# Altium PCB Curtain_robot.PcbDoc
Units mil, origin at the board's own origin, x right, y up, seen from the top; angles counter-clockwise.
Board outline 1771.65 x 787.4 mil, 2 copper layers (Top Layer, Bottom Layer); 38 components, 28 nets, 148 pads, 36 vias.
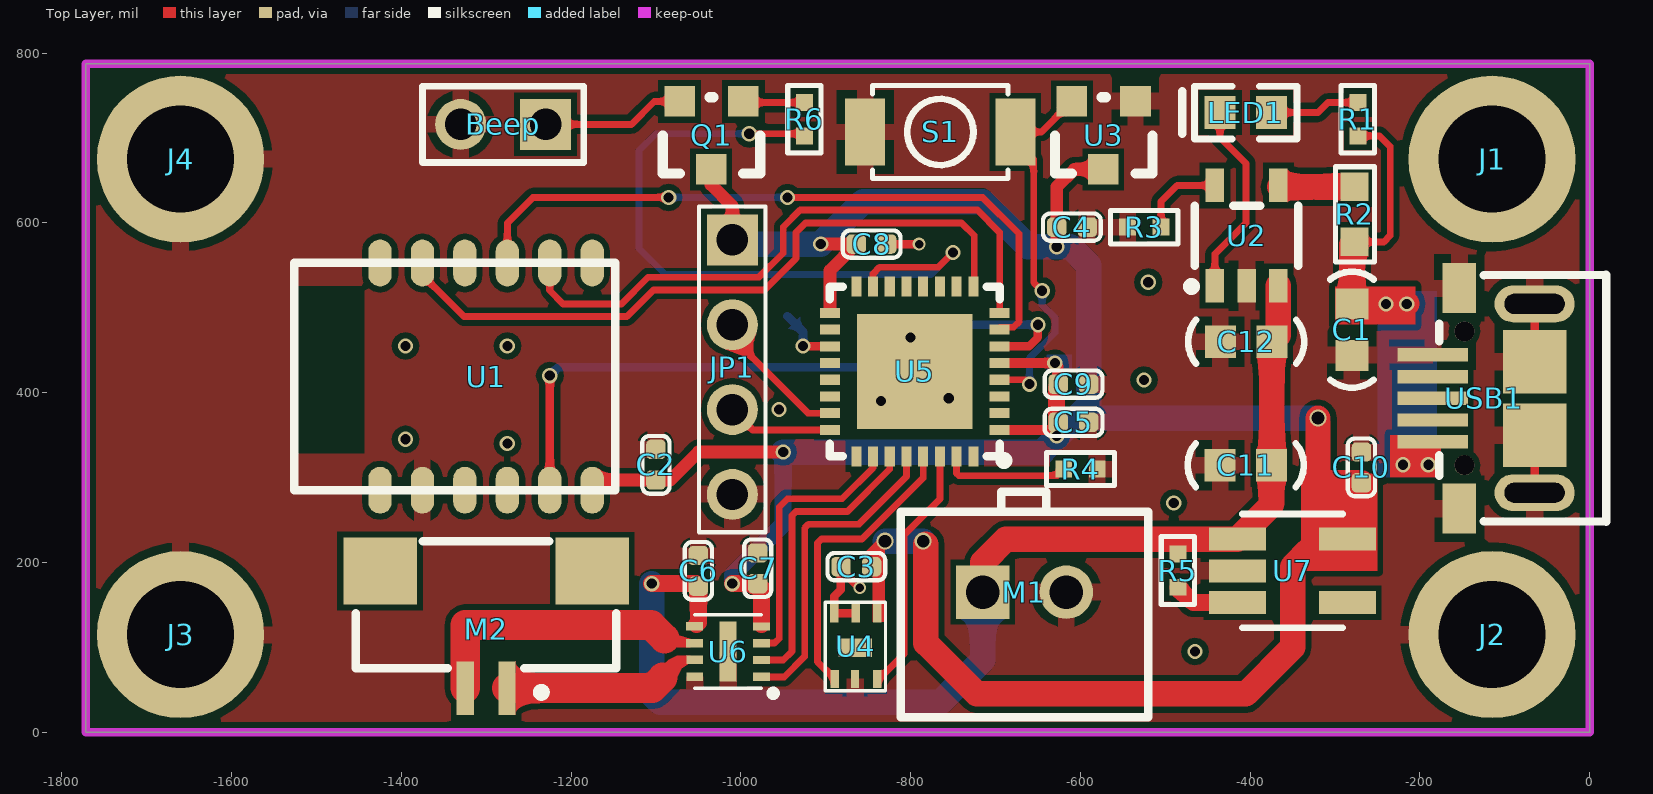
[diagram p0: Top Layer view]
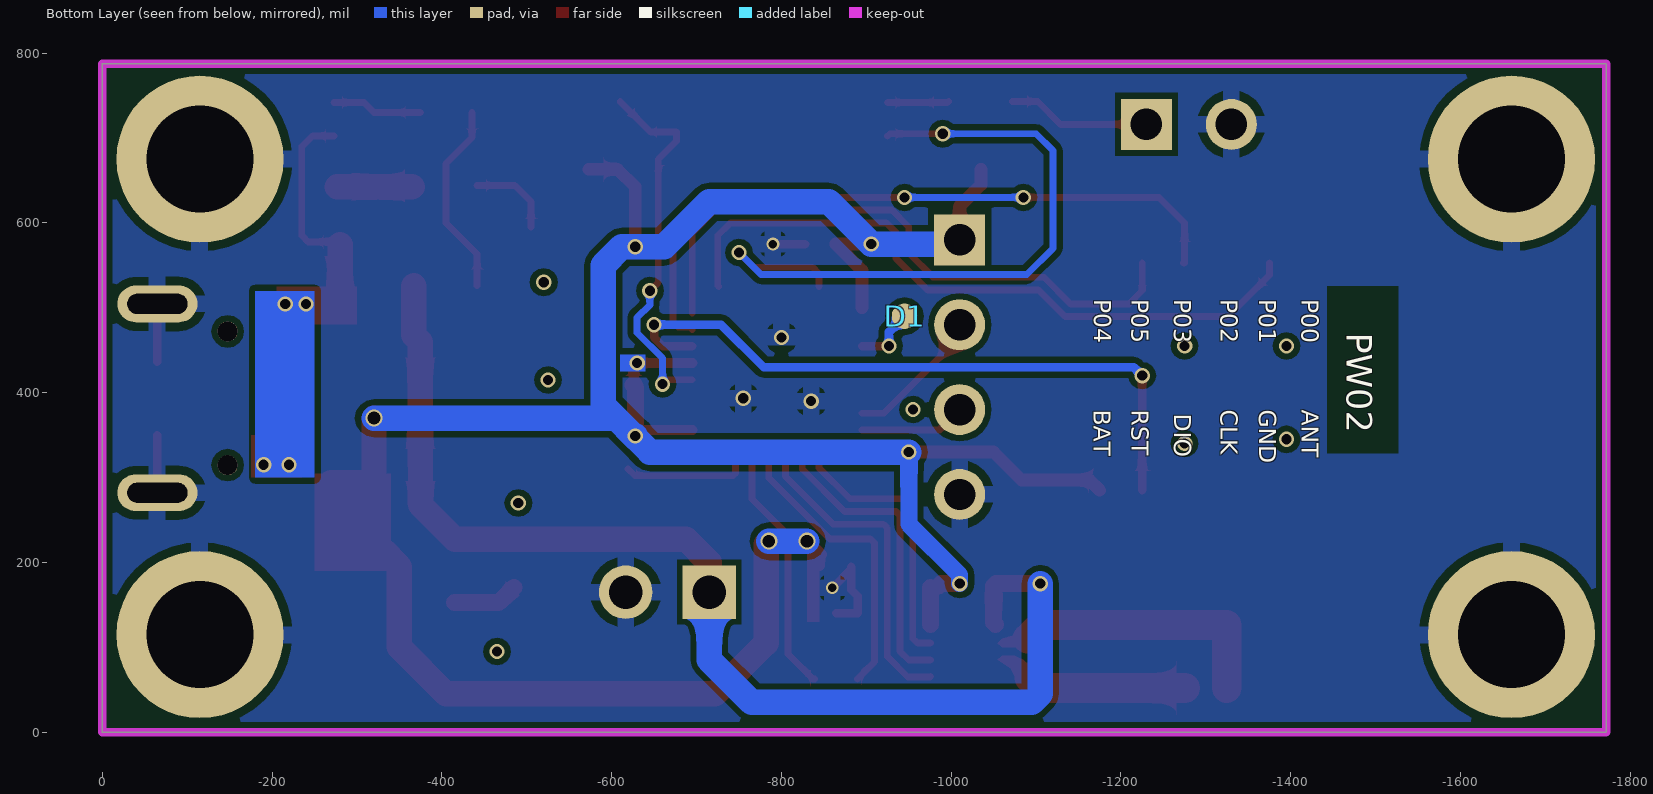
[diagram p1: Bottom Layer view, seen from below]
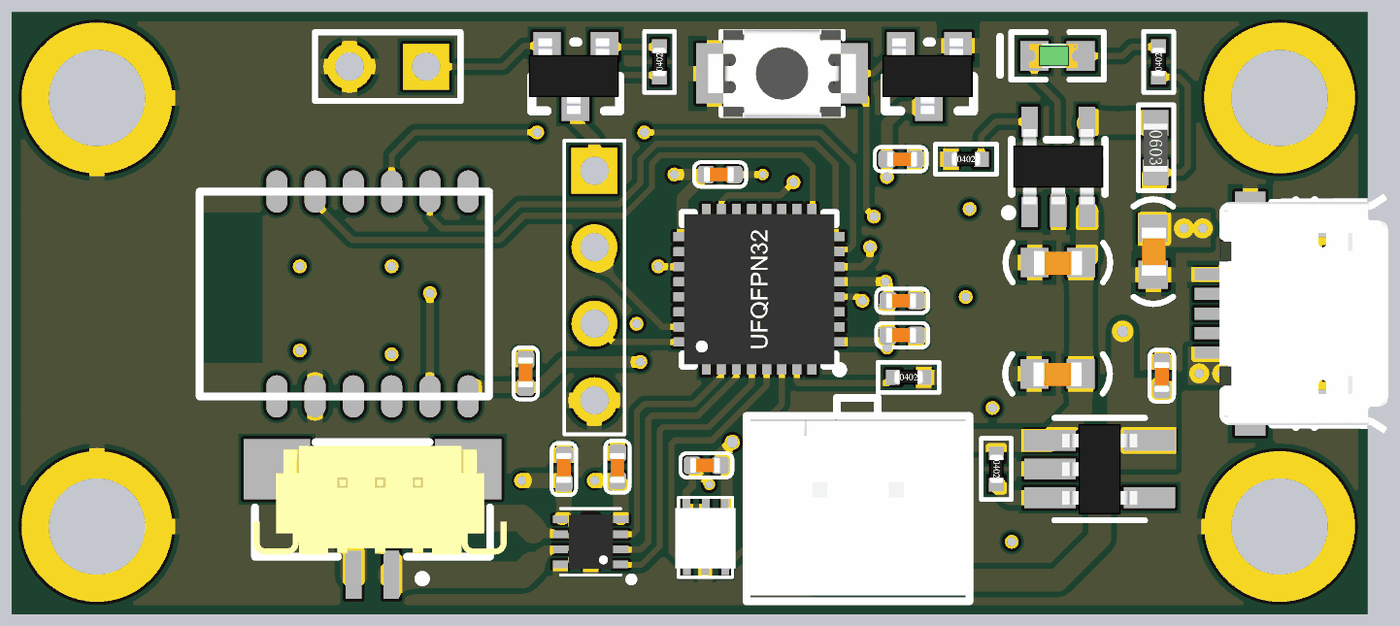
[diagram p2: 3D render of the assembled board from above, using the file's embedded part models]

## Layer stack, top to bottom
Top Solder: solder mask 0.4, Solder Resist, Dk 3.5
Top Layer: signal copper 1.4
Dielectric 1: dielectric 12.6, FR-4, Dk 4.8
Bottom Layer: signal copper 1.4
Bottom Solder: solder mask 0.4, Solder Resist, Dk 3.5

## Board outline
-1771.65,0 -1771.65,787.4 0,787.4 0,0

## Design rules (kind name [scope] priority, off if disabled: settings)
Clearance [All] p1: gap=7
ComponentClearance [All] p1: gap=0 collisioncheckmode=3 verticalgap=0 showdistances=FALSE
HoleSize [All] p1: absolutevalues=TRUE maxlimit=500 minlimit=1 maxpercent=80.000 minpercent=20.000
MinimumSolderMaskSliver [All] p1: minsoldermaskwidth=0
PlaneConnect [All] p1: planeconnectstyle=Relief reliefexpansion=20 reliefentries=4 reliefconductorwidth=20 reliefairgap=10
PolygonConnect [All] p1: connectstyle=Relief reliefconductorwidth=20 reliefentries=4 polygonreliefangle="90 Angle" airgapwidth=10
RoutingVias [All] p1: holewidth=12 width=18 viastyle="Through Hole" minholewidth=1 minwidth=1 maxholewidth=100 maxwidth=100
SilkToSilkClearance [All] p1: silktosilkclearance=0
SilkToSolderMaskClearance [IsPad] p1: minsilkscreentomaskgap=0 clearancetoexposedcopper=TRUE
SolderMaskExpansion [All] p1: expansion=4
Width [All] p1: maxlimit=100 minlimit=1 preferedwidth=10
24 further rules are at their usual default settings.

## Classes and differential pairs
component class Curtain_robot: Beep C1 C2 C3 C4 C5 C6 C8 C9 C10 C11 C12 D1 J1 J2 J3 J4 JP1 LED1 M1 M2 Q1 R1 R2 R3 R4 R5 R6 S1 U1 U2 U3 U4 U5 U6 U7

## Components (designator, comment, footprint, x,y, rotation, side; value= is the part's Value field where it differs from the comment)
Beep "Beep" HEADER_2X1_2.54MM -1230,716.04 r180 top
C1 "10uF" C-0603 -280,474.21 r90 top
C2 "100nF" C0402 -1100,315 r90 top
C3 "100nF" C0402 -863.9,195 r180 top
C4 "100nF" C0402 -609.89,595 r0 top
C5 "100nF" C0402 -608,365 r180 top
C6 "100nF" C0402 -1050,190 r90 top
C7 "100nF" C0402 -980,193.11 r270 top
C8 "100nF" C0402 -845.9,575 r180 top
C9 "100nF" C0402 -608,410 r180 top
C10 "100nF" C0402 -268.87,312 r270 top
C11 "1uF" C-0603 -405.12,314.57 r0 top
C12 "10uF" C-0603 -404.69,460 r0 top
D1 "Debug_test" DEBUG_TEST -945,490 r0 top
J1 "VIA" VIA -115,675 r0 top
J2 "VIA" VIA -115,115 r0 top
J3 "VIA" VIA -1660,115 r0 top
J4 "VIA" VIA -1660,675 r0 top
JP1 "Header_4x1_2.54mm" HEADER_4X1_2.54MM -1010,580 r270 top
LED1 "LED" LED0603 -405.12,730 r180 top
M1 "Battery" CONN-TH_P2.50_HX25035-2A -665.79,165 r0 top
M2 "Motor_N20" CONN-SMD_1.25-2P -1300,110 r180 top
Q1 "BC850CW-115" SOT-23(SOT-23-3) -996.87,743.53 r180 top
R1 "4.7K" R0402 -272.99,722.08 r90 top
R2 "0.6R" R0603 -276.97,610 r270 top
R3 "3.6K" R0402 -524.68,595 r0 top
R4 "1M" R0402 -599.68,310 r0 top
R5 "0R" R0402 -485,190.31 r270 top
R6 "1K" R0402 -925,722.08 r90 top
S1 "SPST" KEY -765,707.04 r180 top
U1 "PW02" "PW02 - DUPLICATE" -1147.83,285 r90 top
U2 "TP4065" SOT-23-5_L3.0-W1.7-P0.95-LS2.8-BL -404.06,585 r0 top
U3 "IMP809SEUR/T" SOT-23(SOT-23-3) -534.87,743.53 r180 top
U4 "OPT3001DNPR" USON6_L2.7-W1.8-P0.65-BL-EP -864.62,101.34 r270 top
U5 "STM32L051K8U6" UFQFPN-32_L5.0-W5.0-P0.50-BL-EP -795,425 r90 top
U6 "DRV8837CDSGR" DRV8837 -1015,95 r90 top
U7 "SGM2040-3.3YN5G/TR" SOT-23-5 -350.04,190 r270 top
USB1 "MICRO5.9MMUSB" MICRO-USB-SMD_5P-P0.65-H-F_MICRO5.9MMUSB -124.84,393.31 r90 top locked

## Footprints (in the part's own frame and the unit in brackets; to place one, negate y for a bottom-side part, rotate by r counter-clockwise, add the part's x,y. Pads: shape width x height; smd on the part's side, far side on the other; paste and mask are expansions set on the pad)
C0402 [mm] "Capacitor, Chip; 1.00 mm L X 0.50 mm W X 0.40 mm H body"
  rrect49% 0.58x0.58 smd: 1(-0.457,0)
  rrect45% 0.58x0.58 smd: 2(0.46,0)
  silkscreen extent -0.86,-0.41 0.86,0.41, body extent -0.46,-0.25 0.54,0.25, height 0.5
C-0603 [mm] "贴片电容"
  rect 0.93x0.98 smd: 1(-0.77,0) 2(0.77,0)
  silkscreen extent -1.73,-0.65 1.73,0.65, body extent -0.8,-0.42 0.8,0.38, height 0.78
CONN-SMD_1.25-2P [mm]
  rect 0.52x1.6 smd: 1(-0.625,1.475) 2(0.625,1.475)
  rect 2.2x2 smd: 3(3.175,-2.032) 4(-3.175,-2.032)
  silkscreen extent -3.9,-2.92 3.9,1.73, body extent -4.45,-2.79 3.95,0.81, height 4.8
CONN-TH_P2.50_HX25035-2A [mm]
  rect 1.6x1.6 hole 1: 1(-1.25,0)
  round 1.6 hole 1: 2(1.25,0)
  silkscreen extent -3.7,-3.75 3.7,3, body extent -3.7,-3.56 3.7,2.24, height 7
DEBUG_TEST [mil]
  round 30 smd far side: 1(0,0)
DRV8837 [mm] "低功耗电机驱动"
  rect 0.25x0.5 smd: 1(-0.751,-1.001) 2(-0.252,-1.002) 3(0.251,-1.002) 4(0.751,-1.002) 5(0.751,1.001) 6(0.249,1.001) 7(-0.251,1) 8(-0.75,1)
  rect 1.8x0.5 smd: 9(0,0)
  silkscreen extent -1.35,-1.45 1.1,1, body extent -0.9,-0.73 0.9,0.74, height 0.8
HEADER_2X1_2.54MM [mil] "Header_4X1_2.54mm,Hole Size 0.94mm,Size 1.1*1.1mm"
  rect 60x60 hole 37.01 paste-43.31: 1(0,0)
  round 60 hole 37.01 paste-43.31: 2(100,0)
  silkscreen extent -45,-45 145,45
HEADER_4X1_2.54MM [mil] "Header_4X1_2.54mm,Hole Size 0.94mm,Size 1.1*1.1mm"
  rect 60x60 hole 37.01 paste-43.31: 1(0,0)
  round 60 hole 37.01 paste-43.31: 2(100,0) 3(200,0) 4(300,0)
  silkscreen extent -39,-39 344,39
KEY [mm] "按键"
  rect 1.2x2 smd: 1(-2.25,0) 2(2.25,0)
  silkscreen extent -2.03,-1.4 2.03,1.4, body extent -2.45,-1.45 2.45,1.45, height 2
LED0603 [mm] "贴片LED"
  rect 0.93x0.98 smd: 1(-0.77,0) 2(0.77,0)
  silkscreen extent -1.53,-0.79 1.91,0.79, body extent -0.67,-0.4 0.93,0.4, height 0.6
MICRO-USB-SMD_5P-P0.65-H-F_MICRO5.9MMUSB [mm]
  rect 0.4x2.1 smd: 1(-1.3,1.525) 2(-0.65,1.525) 3(0,1.525) 4(0.65,1.525) 5(1.3,1.525)
  rect 1.5x1 smd: 6(-3.3,0.725) 6(3.3,0.725)
  oval 1.1x2.399 hole 0.6 slot 1.8 at 90 deg: 6(-2.825,-1.525) 6(2.825,-1.525)
  rect 1.9x1.9 smd: 6(-1.1,-1.525) 6(1.1,-1.525)
  round 0.6 hole 0.6 unplated: ""(-2,0.575) ""(2,0.575)
  silkscreen extent -3.7,-3.67 3.7,1.32, body extent -4,-3.85 4,1.75, height 2.75
"PW02 - DUPLICATE" [mm] "低功耗蓝牙"
  oval 1.4x0.7 smd: 1(0,7.04) 2(0,5.77) 3(0,4.5) 4(0,3.23) 5(0,1.96) 6(0,0.69) 7(6.8,0.69) 8(6.8,1.96) 9(6.8,3.23) 10(6.8,4.5) 11(6.8,5.77) 12(6.8,7.04)
  Top Layer pour cut-out: 1.104,7.506 1.104,9.619 6.099,9.619 6.099,7.506 1.104,7.506
  Bottom Layer pour cut-out: 1.105,7.504 1.105,9.617 6.099,9.617 6.099,7.504 1.105,7.504
  silkscreen extent 0,0 6.8,9.6
R0402 [mil] "C0402"
  rect 19.68x19.68 smd: 1(-19.69,0) 2(19.68,0)
  silkscreen extent -40,-20 40,20, body extent -20,-10 20,10, height 12
R0603 [mm]
  rect 0.85x0.85 smd: 1(-0.825,0) 2(0.825,0)
  silkscreen extent -1.43,-0.58 1.43,0.6, body extent -0.8,-0.4 0.8,0.4, height 0.45
SOT-23(SOT-23-3) [mil] "MMBT3904"
  rect 36x36 smd: 1(0.13,0.5) 2(75.13,0.5) 3(38.13,80.5)
  silkscreen extent -20,-5 95,85, body extent -19,-9 99,89, height 42
SOT-23-5 [mm] "SOT-23-5-SGM2040"
  rect 0.69x1.7 smd: 1(-0.95,-1.65) 2(0,-1.65) 3(0.95,-1.65) 4(0.95,1.65) 5(-0.95,1.65)
  silkscreen extent -1.7,-1.5 1.7,1.5, body extent -1.5,-1.25 1.5,1.25, height 1.06
SOT-23-5_L3.0-W1.7-P0.95-LS2.8-BL [mm]
  rect 0.55x1 smd: 1(-0.95,-1.5) 2(0,-1.5) 3(0.95,-1.5) 4(0.95,1.5) 5(-0.95,1.5)
  silkscreen extent -1.78,-1.65 1.55,0.9, body extent -1.5,-1.25 1.5,1.25, height 1.06
UFQFPN-32_L5.0-W5.0-P0.50-BL-EP [mm]
  rect 0.3x0.6 smd: 1(-1.75,-2.54) 2(-1.25,-2.54) 3(-0.75,-2.54) 4(-0.25,-2.54) 5(0.25,-2.54) 6(0.75,-2.54) 7(1.25,-2.54) 8(1.75,-2.54) 17(1.75,2.54) 18(1.25,2.54) 19(0.75,2.54) 20(0.25,2.54) 21(-0.25,2.54) 22(-0.75,2.54) 23(-1.25,2.54) 24(-1.75,2.54)
  rect 0.6x0.3 smd: 9(2.54,-1.75) 10(2.54,-1.25) 11(2.54,-0.75) 12(2.54,-0.25) 13(2.54,0.25) 14(2.54,0.75) 15(2.54,1.25) 16(2.54,1.75) 25(-2.54,1.75) 26(-2.54,1.25) 27(-2.54,0.75) 28(-2.54,0.25) 29(-2.54,-0.25) 30(-2.54,-0.75) 31(-2.54,-1.25) 32(-2.54,-1.75)
  rect 3.45x3.45 smd: 33(0,0)
  silkscreen extent -2.79,-2.79 2.54,2.54, body extent -2.5,-2.5 2.5,2.5, height 0.55
USON6_L2.7-W1.8-P0.65-BL-EP [mm] "环境光传感器"
  rect 0.55x0.25 smd: 1(-0.981,0.64) 2(-0.983,-0.003) 3(-0.982,-0.645) 4(0.983,-0.63) 5(0.983,-0.02) 6(0.983,0.645)
  rect 0.55x1 smd: 7(0.047,-0.012)
  silkscreen extent -1.31,-0.91 1.34,0.89, body extent -0.95,-1.01 1.05,0.99, height 0.64
VIA [mm] "安装孔"
  round 5 hole 3.2: 1(0,0)

## Part data
Beep M1: library part Motor_N20
C1 C2 C3 C4 C5 C6 C7 C8 C9 C10 C11 C12: library part Cap, "Cap"
J1 J2 J3 J4: "安装孔"
LED1: "FC-DA1608HGK-572C"
Q1: "NPN"
R1 R2 R3 R4 R5 R6: library part Res, "Resistor"
U3: "MCU监控芯片-2.93V"
U7: "IC_LDO_3.3V_250mA_5P_SOT-23-5"

## Free pads (board coordinates)
  round 18 hole 12: 6(-950,330)

## Via types
v1: diameter 18, hole 12, Top Layer to Bottom Layer, 31 vias
v2: diameter 20, hole 15, Top Layer to Bottom Layer, 3 vias
v3: diameter 15, hole 10, Top Layer to Bottom Layer, 2 vias

## Nets (pads, with @x,y where several pads share a name; then routed paths per layer and width w, separated by ;. In a path a pad name is that pad's centre, name@x,y a point inside that pad or via, vN(x,y) a via of type N, cw(c..) or ccw(c..) an arc to the next point about the centre after c; other vN are vias at no path point)
BEEP: R6.1 U5.15 | length 832.5
  Top Layer w8: v1(-990,705) -927.61,705 R6.1 ; U5.15 -844.21,540 -836.4,547.81 -767.19,547.81 v1(-750,565)
  Bottom Layer w8: v1(-990,705) -1100,705 -1120,685 -1120,570 -1089,539 -776,539 v1(-750,565)
BT_EN: U1.9 U5.7 | length 813.4
  Top Layer w8: U1.9@-1273.82,552.72 U1.9 -1275,600 -1245,630 v1(-1085,630) ; v1(-945,630) -715,630 -672.18,587.18 -672.18,483.44 -678.63,476.99 -695,476.99 U5.7
  Bottom Layer w8: v1(-1085,630) v1(-945,630)
BT_RST: U1.5 U5.6 | length 799.2
  Top Layer w10: U1.5 v1(-1225,420) ; U5.6 -660.47,454.53 -650,465 v1(-650,480)
  Bottom Layer w10: v1(-1225,420) -1215,430 -779,430 -729,480 v1(-650,480)
BT_RX: U1.11 U5.9 | length 814.9
  Top Layer w8: U1.11 -1375,538.32 -1326.21,489.53 -1134.26,489.53 -1102.79,521 -972.23,521 -935,558.23 -935,588.79 -923.79,600 -740,600 -725,585 -725,526.1 U5.9
BT_TX: U1.8 U5.8 | length 738.5
  Top Layer w8: U1.8 -1225,520 -1209.53,504.53 -1140.47,504.53 -1109,536 -978.44,536 -950,564.44 -950,595 -930,615 -721.21,615 -695,588.79 U5.8
DC3.3V: C2.1 C3.1 C4.1 C5.2 C7.2 C8.2 C9.2 C10.2 JP1.1 pad.6 Q1.3 U1.6 U3.3 U4.1 U5.1 U5.5 U5.17 U6.4 U7.5 | length 3422.6
  Top Layer w10: C3.1 -845.9,209.1
  Top Layer w12: U5.1 -631.1,356.1 -627.89,352.89 v1(-627.89,348.94) ; U5.5 v1@-630.16,434.84 ; C9.2 v1@-626.11,430.8
  Top Layer w15: U1.6 -1163,297 C2.1 -1083,297 -1050,330 pad.6 ; Q1.3 -1035,645 -1010,620 JP1.1 ; v1(-905.79,575) C8.2 -895,544.01 -895,500 ; -845.9,209.1 v2(-830,225) ; v1(-627.89,571.78) C4.1 -627.89,642.11 -606.96,663.04 U3.3
  Top Layer w20: v1(-1010,175) -988.11,175 C7.2@-985,171.89 ; U6.4@-975.72,126.8 C7.2@-975.72,170.72 ; v1@-627.89,352.89 -627.89,406 -625,408.89 C9.2 ; U7.5@-317.6,227.4 U7.5
  Top Layer w30: v2@-781.9,221.33 -781.9,105 -721.9,45 -405,45 -350,100 -350,195 U7.5@-317.6,227.4 ; v2(-320,370) -320,300 -313.89,293.89 C10.2 -268.87,243.61 U7.5
  Bottom Layer w20: v1(-1010,175) -1010,185 -950,245 pad.6
  Bottom Layer w30: JP1.1 -1005,575 v1(-905.79,575) -855.79,625 -715,625 -661.78,571.78 v1(-627.89,571.78) -611.78,571.78 -590,550 -590,385 -605,370 ; pad.6 -645,330 -627.89,347.11 v1(-627.89,348.94) -626.06,348.94 -605,370 ; v2(-830,225) v2(-785.16,225) ; v2(-320,370) -605,370
  other v1: -630,435
DEBUG_TX: D1.1 U5.19 | length 75.4
  Top Layer w10: v1(-926.67,455) -924.06,455 -924.53,454.53 U5.19
  Bottom Layer w10: D1.1 -926.67,471.67 v1(-926.67,455)
GND: Beep.2 C1.1 C2.2 C3.2 C4.2 C5.1 C6.2 C7.1 C8.1 C9.1 C10.1 C11.1 C12.1 J1.1 J2.1 J3.1 J4.1 JP1.4 M1.2 R3.1 R4.2 S1.2 U1.2 U2.2 U3.1 U4.2 U4.3 U4.5 U5.33 U6.8 U6.9 U7.2 USB1.5 USB1.6 | length 288.4
  Top Layer w10: C3.2 C3.2@-882.01,192.01 ; U4.2 U4.2 U4.3 -890,160 -882.01,167.99 C3.2@-882.01,192.01 ; v3(-860,170) C3.2@-882.01,192.01 ; C8.1 v3(-790,575) ; USB1.6@-64.8,282.1 USB1.6@-64.8,350 ; USB1.6@-64.8,436.62 USB1.6@-64.8,504.52
  other v1: -835,390 -755,393.31 -800,465
M+: M2.2 U6.6 | length 315.4
  Top Layer w35: M2.2 -1324.61,126.13 -1105.78,126.13 -1089.98,110.33
M-: M2.1 U6.7 | length 188.8
  Top Layer w35: M2.1 -1104.29,51.93 -1091.78,64.43
MCU_RST: S1.1 U3.2 U5.4 | length 447.2
  Top Layer w8: U5.4 -665.16,415.16 v1(-660,410) ; v1(-645,520) -655,530 -655,675 -676.42,696.42 S1.1 -646,707.04 U3.2
  Bottom Layer w8: v1(-660,410) -660,440.56 -630,470.56 -630,488.28 -645,503.28 v1(-645,520)
N_IN1: U5.27 U6.2 | length 353.1
  Top Layer w8: U6.2 -975.47,85 -950,85 -939.72,95.28 -939.72,255.28 -935,260 -874.41,260 -824.53,309.88 U5.27
N_IN2: U5.28 U6.1 | length 381.2
  Top Layer w8: U6.1 -975.18,65 -948.79,65 -924.72,89.07 -924.72,240.28 -920,245 -860.91,245 -804.84,301.07 U5.28
NetBeep_1: Beep.1 Q1.2 | length 169.2
  Top Layer w8: Beep.1 -1128.96,716.04 -1101.96,743.04 Q1.2
NetLED1_1: LED1.1 R1.2 | length 106.7
  Top Layer w8: LED1.1 -320,730 -308.24,741.76 R1.2
NetLED1_2: LED1.2 U2.1 | length 231.8
  Top Layer w8: U2.1 -441.46,563.54 -405,600 -405,670 -435.43,700.43 LED1.2
NetQ1_1: Q1.1 R6.2 | length 72.5
  Top Layer w8: Q1.1 -995.72,741.76 R6.2
NetR2_1: R2.1 U2.4 | length 90.3
  Top Layer w20: U2.4 U2.4@-365.07,642.48
  Top Layer w30: U2.4@-365.07,642.48 R2.1
NetR3_2: R3.2 U2.5 | length 101.4
  Top Layer w8: R3.2 -505,625 -485.94,644.06 U2.5
NetR4_1: R4.1 U5.31 | length 150.8
  Top Layer w8: U5.31 -745.79,304.97 -743.01,302.19 -627.18,302.19 R4.1
NetR5_2: R5.2 U7.3 | length 77.5
  Top Layer w20: R5.2 -466.97,152.6 U7.3
NSLEEP: U5.26 U6.3 | length 321.3
  Top Layer w8: U6.3 -960.12,104.88 -954.72,110.28 -954.72,265.28 -945,275 -880.62,275 -844.21,311.41 U5.26
OPT_SCL: U4.4 U5.29 | length 350.3
  Top Layer w8: U4.4 -889.52,62.65 -909.72,82.85 -909.72,222.68 -905,227.4 -857.3,227.4 -785.16,299.54 U5.29
OPT_SDA: U4.6 U5.30 | length 294
  Top Layer w8: U4.6 -837.35,62.65 -807.9,92.1 -807.9,232.1 -765.47,274.53 U5.30
VBAT: C6.1 C11.2 C12.2 M1.1 R5.1 U2.3 U6.5 U7.1 | length 1392.3
  Top Layer w11.81: C12.2 C12.2@-366.65,467.72
  Top Layer w20: v1(-1105,175) -1053,175 C6.1 -1050,129.01 U6.5@-1052.3,126.72 ; C11.2 C11.2@-374.37,315
  Top Layer w30: M1.1 -715,200 -687.6,227.4 U7.1 -374.8,267.6 C11.2 ; C11.2@-374.37,315 C12.2 ; C12.2@-366.65,467.72 U2.3
  Bottom Layer w30: v1(-1105,175) -1105,45 -1095,35 -765,35 -715,85 M1.1
VUSB: C1.2 R1.1 R2.2 USB1.1 | length 331.9
  Top Layer w8: R2.2 -242.52,577.52 -235,585.04 -235,690 -247.39,702.39 R1.1
  Top Layer w20: R2.2@-280,574.49 R2.2
  Top Layer w30: R2.2@-280,574.49 C1.2 v1(-240,504.53) v1(-215.47,504.53)
  other v1: -220,315 -190,315
WCLK: JP1.3 U5.24 | length 124.9
  Top Layer w8: JP1.3 -986.1,356.1 U5.24
WDIO: JP1.2 U5.23 | length 167
  Top Layer w8: JP1.2 -1010,465 -920.79,375.79 U5.23
pads on no net: M2.3 M2.4 U1.1 U1.3 U1.4 U1.7 U1.10 U1.12 U4.7 U5.2 U5.3 U5.10 U5.11 U5.12 U5.13 U5.14 U5.16 U5.18 U5.20 U5.21 U5.22 U5.25 U5.32 U7.4 USB1. USB1.2 USB1.3 USB1.4
copper on no net:
  other v1: -465,95 -490,270 -1275,340 -1395,345 -955,380 -525,415 -1395,455 -1275,455 -520,530

## Polygon pours and split planes (outlines as drawn)
GND on Top Layer "Bottom Layer-No Net" (solid, remove dead copper, pour order 32): -1820,825 -1825,820 -1825,-60 100,-60 105,-55 75,-25 75,840 -1820,840 -1830,830
GND on Bottom Layer "Bottom Layer-No Net" (solid, remove dead copper, pour order 34): -1820,815 -1810,805 -1810,-25 20,-25 35,-10 40,-5 40,815 -1825,815

## Keep-outs
Keep-Out Layer:
  the board outline again, w10

## Other copper
Top Layer:
  rectangle net DC3.3V: -845,130 -830,217.05
  rectangle net VUSB: -300,480 -205,525
  rectangle net VUSB: -235,300 -175,350
  rectangle net DC3.3V: -340,190 -250,305
  region net M+: -1080,115 -1074.62,115 -1059.62,110 -1054.42,104.8 -1059.62,100 -1080,100 -1086.66,108.34 -1087.54,109.23
  region net M-: -1090,80 -1084.83,66.32 -1074.75,64.75 -1070,75 -1054.38,85.12 -1059.26,90 -1075.66,90 -1084.87,85.13
Bottom Layer:
  rectangle net VUSB: -250,300 -180,520
  rectangle net DC3.3V: -640,425 -610,445

## Text inside footprints (layer, text, board x,y; h text height)
U1: Bottom Overlay "P05" at -1212.83,510 h20 r90; Bottom Overlay "P04" at -1168.57,509.9 h20 r90; Bottom Overlay "P03" at -1262.83,510 h20 r90; Bottom Overlay "P02" at -1317.83,510 h20 r90; Bottom Overlay "P01" at -1362.83,510 h20 r90; Bottom Overlay "P00" at -1412.83,510 h20 r90; Bottom Overlay "ANT" at -1412.83,380 h20 r90; Bottom Overlay "GND" at -1362.83,380 h20 r90; Bottom Overlay "CLK" at -1317.83,380 h20 r90; Bottom Overlay "DIO" at -1262.83,375 h20 r90; Bottom Overlay "RST" at -1212.83,380 h20 r90; Bottom Overlay "BAT" at -1167.83,380 h20 r90